# Altium PCB CPUBoard.PcbDoc
Units mil, origin at the board's own origin, x right, y up, seen from the top; angles counter-clockwise.
Board outline 5387.18 x 590.19 mil, 2 copper layers (Top Layer, Bottom Layer); 86 components, 65 nets, 284 pads, 220 vias.
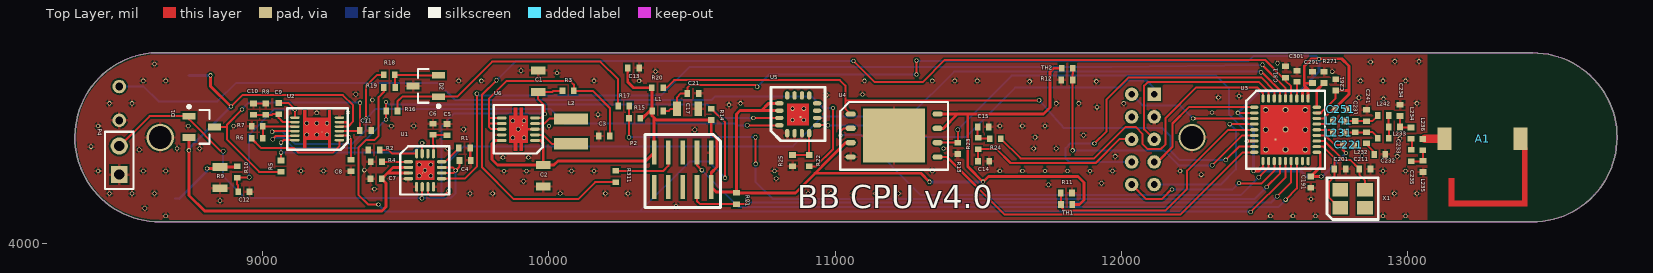
[diagram p0: Top Layer view]
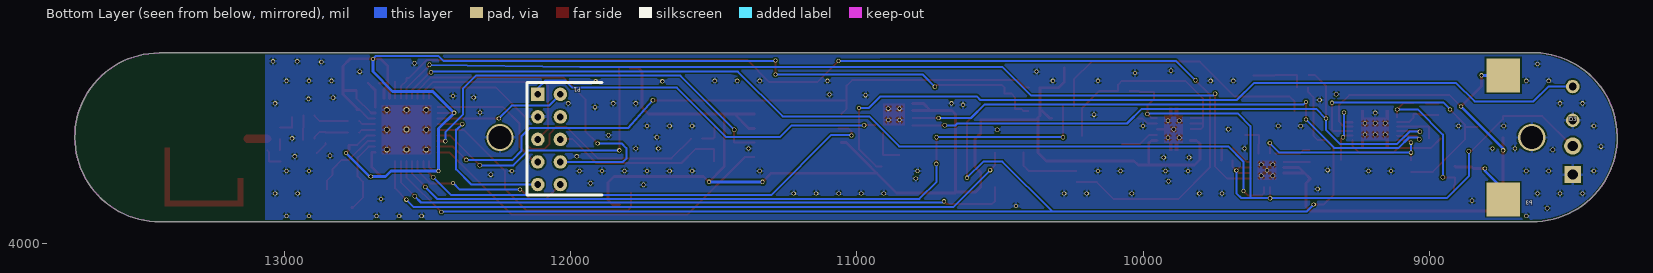
[diagram p1: Bottom Layer view, seen from below]

## Layer stack, top to bottom
Top Layer: signal copper 1.4
Dielectric: dielectric 12.6, FR-4, Dk 4.8
Bottom Layer: signal copper 1.4

## Board outline
8641.6,4074.5 cw(c8639.59,4370.22) 8610.33,4664.5 13436,4664.5 13436,4664.64 cw(c13435.95,4369.54) 13433.98,4074.44 13433.98,4074.5

## Design rules (kind name [scope] priority, off if disabled: settings)
Clearance "Stitching GND" [IsStitchingVia and InNet('GND') vs (IsVia and (Not IsStitchingVia)) Or IsPad] p1: gap=6
Clearance [All] p2: gap=6
HoleSize [All] p1: absolutevalues=TRUE maxlimit=500 minlimit=6 maxpercent=80.000 minpercent=20.000
HoleToHoleClearance [All] p1: gap=1 allowstackedmicrovias=TRUE
MinimumSolderMaskSliver [All] p1: minsoldermaskwidth=1
PlaneClearance [All] p1: clearance=10
PlaneConnect [All] p1: planeconnectstyle=Relief reliefexpansion=10 reliefentries=4 reliefconductorwidth=10 reliefairgap=10
PolygonConnect [All] p1: connectstyle=Relief reliefconductorwidth=10 reliefentries=4 polygonreliefangle="90 Angle"
RoutingLayers RoutingLayers_1 [InNet('GND')] p1: top layer_v5=FALSE bottom layer_v5=FALSE
RoutingLayers [All] p2: top layer_v5=TRUE bottom layer_v5=TRUE
RoutingVias [All] p1: holewidth=11 width=15 viastyle="Through Hole" minholewidth=11 minwidth=15 maxholewidth=1000 maxwidth=1000
SilkToSilkClearance [All] p1: silktosilkclearance=1
SilkscreenOverComponentPads [All] p1: minsilkscreentomaskgap=1
SolderMaskExpansion [All] p1: expansion=3
Width [All] p1: maxlimit=100 minlimit=7 preferedwidth=7
20 further rules are at their usual default settings.

## Classes and differential pairs
net class Antenna: NetA1_1
net class RF: RF_N RF_P
component class "I-O Expander": D3 R22 R25 U5
component class VREG: C1 C2 C3 L2 R3 U6
component class RF: A1 C231 C232 C233 C234 C235 C241 L231 L232 L233 L234 L235 L236 L241 L242
component class FLASH: C13 R20 U4
component class CPU: C14 C15 C17 C21 C191 C201 C211 C221 C251 C261 C291 C301 C311 L1 P1 P2 R11 R12 R13 R21 R23 R24 R271 R311 TH1 TH2 U3 X1
component class BAT: C4 C5 C6 C7 C8 C9 C10 C11 C12 D1 P3 P4 R1 R2 R4 R5 R6 R7 R8 R9 R10 U1 U2
component class CPU2: D2 R14 R15 R16 R17 R18 R19

## Components (designator, comment, footprint, x,y, rotation, side; value= is the part's Value field where it differs from the comment)
A1 "0915AT43A0026E" 0915AT43A0026 13256,4365 r0 top
C1 "Cap" C_0805 9962,4566 r270 top
C2 "Cap" C_0805 9980,4235 r90 top
C3 "Cap" C_0402 10193,4374 r0 top
C4 "Cap" C_0402 9707,4289 r180 top
C5 "Cap" C_0402 9644,4396.69 r270 top
C6 "Cap" C_0402 9595,4397.69 r270 top
C7 "Cap" C_0402 9396,4224.69 r0 top
C8 "Cap" C_0402 9308,4271 r90 top
C9 "Cap" C_0402 9056,4470 r270 top
C10 "Cap" C_0402 8968,4468 r270 top
C11 "Cap" C_0402 9359,4393 r180 top
C12 "Cap" C_0402 8934,4179.68 r180 top
C13 "Cap" C_0402 10295,4612 r180 top
C14 "Cap" C_0402 11518,4286 r180 top
C15 "Cap" C_0402 11517,4406 r180 top
C17 "Cap" C_0805 10484,4469 r180 top
C21 "Cap" C_0402 10503,4523 r180 top
C191 "Cap" C_0402 12661,4213 r90 top
C201 "Cap" C_0402 12763,4259 r180 top
C211 "Cap" C_0402 12850,4259 r180 top
C221 "Cap" C_0402 12793,4343 r180 top
C231 "Cap" C_0402 12816,4407 r270 top
C232 "Cap" C_0402 12902,4310 r0 top
C233 "Cap" C_0402 12914,4366 r0 top
C234 "Cap" C_0402 12973,4464 r270 top
C235 "Cap" C_0402 13012,4306 r270 top
C241 "Cap" C_0402 12856,4446 r270 top
C251 "Cap" C_0402 12766,4467 r180 top
C261 "Cap" C_0402 12748,4553 r270 top
C291 "Cap" C_0402 12667,4579 r270 top
C301 "Cap" C_0402 12613,4583 r90 top
C311 "Cap" C_0402 12573,4598 r270 top
D1 "BAT54C" SOT-23_N 8787,4406 r0 top
D2 "AZ23C5V6-V-GS08" SOT-23_N 9570,4549 r180 top
D3 "LED" LED 8499,4547 r270 bottom
L1 "Inductor" R_0402 10380,4462 r180 top
L2 "Inductor" L_1212 10077,4434 r270 top
L231 "Inductor" R_0402 12758,4386 r0 top
L232 "Inductor" R_0402 12856,4368 r270 top
L233 "Inductor" R_0402 12953,4406 r0 top
L234 "Inductor" R_0402 13011,4384 r270 top
L235 "Inductor" R_0402 13053,4268 r90 top
L236 "Inductor" R_0402 13052,4344 r90 top
L241 "Inductor" R_0402 12758,4427 r0 top
L242 "Inductor" R_0402 12914,4446 r0 top
P1 "Header 10" "609-4377-ND FEMALE" 12114,4519.7 r270 bottom
P2 "Header 5X2" "SMD HEADER" 10567,4196 r180 top
P3 "battery" PL-041939 8742,4586 r270 bottom
P4 "Charger input" HDR1X2 8498.94,4239.2 r90 top
R1 "Res2" R_0402 9705,4332 r180 top
R2 "Res2" R_0402 9389,4325 r180 top
R3 "Res2" R_0402 10067,4532 r180 top
R4 "Res2" R_0402 9397,4284 r0 top
R5 "Res2" R_0402 9064,4269 r90 top
R6 "Res2" R_0402 8981,4366 r180 top
R7 "Res2" R_0402 8981,4408 r0 top
R8 "Res2" R_0402 9011,4468 r90 top
R9 "Res2" R_0805 8851,4229 r270 top
R10 "Res2" R_0402 8911,4248.68 r90 top
R11 "Res2" R_0402 11807.32,4175 r180 top
R12 "Res2" R_0402 11809.31,4570 r0 top
R13 "Res2" R_0402 11428,4331 r90 top
R14 "Res2" R_0402 10567,4450 r270 top
R15 "Res2" R_0402 10299,4436 r0 top
R16 "Res2" R_0402 9451,4462 r0 top
R17 "Res2" R_0402 10261,4479 r0 top
R18 "Res2" R_0402 9442,4588 r0 top
R19 "Res2" R_0402 9443,4544 r180 top
R20 "Res2" R_0402 10379,4543 r180 top
R21 "Res2" R_0402 10655,4156 r90 top
R22 "Res2" R_0402 10909,4288 r90 top
R23 "Res2" R_0402 11499,4348 r270 top
R24 "Res2" R_0402 11558.81,4365 r180 top
R25 "Res2" R_0402 10851,4288 r90 top
R271 "Res2" R_0402 12707,4579 r270 top
R311 "Res2" R_0402 10233,4233 r270 top
TH1 "Res Thermal" R_0402 11808.32,4135 r180 top
TH2 "Res Thermal" R_0402 11810.31,4611 r0 top
U1 "BQ24079TRGTR" S-PVQFN-N16 9567,4254.69 r0 top
U2 "BQ27510DRZR-G2" S-PDSO-N12 9189,4399 r90 top
U3 "CC1110F32RSPR" TI_QFP36 12463.75,4475.05 r0 top
U4 "M25P16-VME6TG" VQFNPN8 11054,4451 r0 top
U5 "PCA9557" PCA9557BS 10870,4450 r90 top
U6 "TPS63001DRCR" S-PVSON-N10 9893,4398 r90 top
X1 "X_26.000/20/40/40/10" NX3225GA 12764,4124 r0 top

## Footprints (in the part's own frame and the unit in brackets; to place one, negate y for a bottom-side part, rotate by r counter-clockwise, add the part's x,y. Pads: shape width x height; smd on the part's side, far side on the other; paste and mask are expansions set on the pad)
"609-4377-ND FEMALE" [mm]
  rect 1.2x1.2 hole 0.6: 1(0,0)
  round 1.2 hole 0.6: 2(2,0) 3(4,0) 4(6,0) 5(8,0) 6(8,2) 7(6,2) 8(4,2) 9(2,2) 10(0,2)
  silkscreen extent -1.07,-0.97 8.93,5.7
0915AT43A0026 [mm]
  rect 1.25x2 smd: 1(-3.251,0) 2(3.499,0)
  Top Layer region: -2.876,-6 -2.376,-6 -2.376,-3.5 -2.876,-3.5
  Top Layer region: -2.515,-6 3.759,-6 3.759,-5.5 -2.515,-5.5
  Top Layer region: 3.624,-6 4.124,-6 4.124,-0.787 3.624,-0.787
C_0402 [mm]
  rect 0.5x0.6 smd: 1(-0.5,0) 2(0.5,0)
C_0805 [mm]
  rect 0.7x1.3 smd: 1(-0.95,0) 2(0.95,0)
HDR1X2 [mm] "Connector; Header; 2 Position"
  rect 1.5x1.5 hole 0.9: 1(0,0)
  round 1.524 hole 0.9: 2(2.54,0)
  silkscreen extent -1.27,-1.27 3.81,1.27
L_1212 [mm]
  rect 1x3 smd: 1(0,0) 2(2.2,0)
LED [mm]
  round 1.2 hole 0.7: 1(0,0) 2(3,0)
NX3225GA [mm] "Crystal, 26.000000MHz, 10.0pF, 50 ohms max, 20/40 ppm, -40C to +85C"
  rect 1.4x1.2 smd: 1(0,0) 2(2.2,1.6) ""(0,1.6) ""(2.2,0)
  silkscreen extent -1.18,-1.07 3.37,2.66
PCA9557BS [mm]
  oval 0.75x0.38 smd: 1(-1.676,0.96) 2(-1.676,0.31) 3(-1.676,-0.34) 4(-1.676,-0.99) 9(1.674,-0.99) 10(1.674,-0.34) 11(1.674,0.31) 12(1.674,0.96)
  oval 0.38x0.75 smd: 5(-0.976,-1.69) 6(-0.326,-1.69) 7(0.324,-1.69) 8(0.974,-1.69) 13(0.974,1.66) 14(0.324,1.66) 15(-0.326,1.66) 16(-0.976,1.66)
  round 0.2 smd mask+0: 17(-0.232,-0.22)
  Top Layer region: 0.975,-0.975 0.975,0.975 -0.975,0.975 -0.975,-0.975
  silkscreen extent -2.35,-2.39 2.4,2.39
PL-041939 [mm] "Li-Po battery pack"
  rect 3x3 smd: 1(0,0) 2(11,0)
R_0402 [mm]
  rect 0.5x0.6 smd: 1(-0.5,0) 2(0.5,0)
R_0805 [mm]
  rect 0.7x1.3 smd: 1(-0.95,0) 2(0.95,0)
S-PDSO-N12 [mm]
  oval 0.2x0.85 smd mask+0.05: 1(-1,-2.009) 2(-0.6,-2.009) 3(-0.2,-2.009) 4(0.2,-2.009) 5(0.6,-2.009) 6(1,-2.009) 7(1,1.941) 8(0.6,1.941) 9(0.2,1.941) 10(-0.2,1.941) 11(-0.6,1.941) 12(-1,1.941)
  round 0.076 smd: 13(-0.279,-0.457)
  Top Layer region: -1.65,1.191 1.65,1.191 1.65,0.941 0.975,0.941 0.975,-1.009 1.65,-1.009 1.65,-1.259 -1.65,-1.259 -1.65,-1.009 -0.975,-1.009 -0.975,0.941 -1.65,0.941
  silkscreen extent -1.86,-2.71 1.84,2.64
S-PVQFN-N16 [mm]
  oval 0.85x0.28 smd mask+0.07: 1(-1.475,0.75) 2(-1.475,0.25) 3(-1.475,-0.25) 4(-1.475,-0.75) 9(1.475,-0.75) 10(1.475,-0.25) 11(1.475,0.25) 12(1.475,0.75)
  oval 0.28x0.85 smd mask+0.07: 5(-0.75,-1.475) 6(-0.25,-1.475) 7(0.25,-1.475) 8(0.75,-1.475) 13(0.75,1.475) 14(0.25,1.475) 15(-0.25,1.475) 16(-0.75,1.475)
  round 0.076 smd: 17(-0.229,-0.254)
  Top Layer region: -0.85,-0.85 0.85,-0.85 0.85,0.85 -0.85,0.85
  silkscreen extent -2.19,-2.16 2.15,2.13
S-PVSON-N10 [mm]
  oval 0.28x0.85 smd mask+0.07: 1(-1,-1.475) 2(-0.5,-1.475) 3(0,-1.475) 4(0.5,-1.475) 5(1,-1.475) 6(1,1.475) 7(0.5,1.475) 8(0,1.475) 9(-0.5,1.475) 10(-1,1.475)
  round 0.076 smd: 11(0.33,-0.38)
  Top Layer region: -1.2,0.825 1.2,0.825 1.2,0.39 1.9,0.39 1.9,0.11 1.2,0.11 1.2,-0.11 1.9,-0.11 1.9,-0.39 1.2,-0.39 1.2,-0.825 -1.2,-0.825 -1.2,-0.39 -1.9,-0.39 -1.9,-0.11 -1.2,-0.11 -1.2,0.11 -1.9,0.11 -1.9,0.39 -1.2,0.39
  silkscreen extent -2.16,-2.18 2.15,2.16
"SMD HEADER" [mil]
  rect 16x84 smd: 1(0,-120) 2(0,0) 3(50,-120) 4(50,0) 5(100,-120) 6(100,0) 7(150,-120) 8(150,0) 9(200,-120) 10(200,0)
  silkscreen extent -32,-184 231,71
SOT-23_N [mm] "SOT23, 3-Leads, Body 2.9x1.3mm, Pitch 0.95mm, Lead Span 2.5mm, IPC Medium Density"
  rect 1.15x0.6 smd: 1(-1.125,0.95) 2(-1.125,-0.95) 3(1.125,0)
  silkscreen extent -1.25,-1.5 0.7,1.92, body extent -0.7,-1.5 0.7,1.5, height 1.1
TI_QFP36 [mm]
  oval 0.75x0.28 smd mask+0.051: 1(-0.006,-0.007) 2(-0.006,-0.507) 3(-0.006,-1.007) 4(-0.006,-1.507) 5(-0.006,-2.007) 6(-0.006,-2.507) 7(-0.006,-3.007) 8(-0.006,-3.507) 9(-0.006,-4.007) 19(5.544,-4.007) 20(5.544,-3.507) 21(5.544,-3.007) 22(5.544,-2.507) 23(5.544,-2.007) 24(5.544,-1.507) 25(5.544,-1.007) 26(5.544,-0.507) 27(5.544,-0.007)
  oval 0.28x0.75 smd mask+0.051: 10(0.769,-4.782) 11(1.269,-4.782) 12(1.769,-4.782) 13(2.269,-4.782) 14(2.769,-4.782) 15(3.269,-4.782) 16(3.769,-4.782) 17(4.269,-4.782) 18(4.769,-4.782) 28(4.769,0.768) 29(4.269,0.768) 30(3.769,0.768) 31(3.269,0.768) 32(2.769,0.768) 33(2.269,0.768) 34(1.769,0.768) 35(1.269,0.768) 36(0.769,0.768)
  round 0.2 smd: 37(1.88,-2.87)
  Top Layer region: 0.569,-4.207 4.969,-4.207 4.969,0.193 0.569,0.193
  silkscreen extent -0.71,-5.46 6.27,1.45
VQFNPN8 [mm]
  rect 5.5x4.8 smd: 0(3.835,-1.922)
  oval 0.9x0.48 smd: 1(0,0) 2(0,-1.27) 3(0,-2.54) 4(0,-3.81) 5(7.7,-3.81) 6(7.7,-2.54) 7(7.7,-1.27) 8(7.7,0)
  silkscreen extent -0.93,-4.94 8.62,1.06

## Part data
A1: "RF CHIP ANTENNA 902 - 928MHZ"
C1 C2 C3 C4 C5 C6 C7 C8 C9 C10 C11 C12 C13 C14 C15 C17 C21 C191 C201 C211 C221 C231 C232 C233 C234 C235 C241 C251 C261 C291 C301 C311: "Capacitor"
D1: "FAIRCHILD SEMICONDUCTOR - BAT54C - SCHOTTKY RECTIFIER, CMN CTHD 0.2A SOT-23"
D2: "Zener Diodes 5.6 Volt 0.3W 5% CA"
D3: library part LED1, "Typical RED GaAs LED"
P1: "Header, 10-Pin"
P2: "Header, 5-Pin, Dual row"
P3: library part "Header 2", "Header, 2-Pin"
P4: library part "Header 2", "SM Battery Holder 1/2 AA"
R1 R2 R3 R4 R5 R6 R7 R8 R9 R10 R11 R12 R13 R14 R15 R16 R17 R18 R19 R20 R21 R22 R23 R24 R25 R271 R311: "Resistor"
TH1 TH2: "Thermistor"
U1: "IC LI-ION CHARGE/PWR MGMT 16QFN"
U2: "IC BATT FUEL GAUGE LI-ION 12SON"
U3: "RF Microcontrollers (MCU) True System-on-Chip"
U4: "IC FLASH 16MBIT 75MHZ 8VDFPN"
U5: "8 channel IO expander"
U6: "DC/DC Switching Regulators 96% Buck-Boost Conv"
X1: library part XTAL, "Crystal Oscillator"

## Via types
v1: diameter 15, hole 11, Top Layer to Bottom Layer, 193 vias
v2: diameter 15, hole 11.81, Top Layer to Bottom Layer, 16 vias
v3: diameter 19.68, hole 15, Top Layer to Bottom Layer, tented top, 9 vias
v4: diameter 95, hole 78.74, Top Layer to Bottom Layer, 2 vias

## Nets (pads, with @x,y where several pads share a name; then routed paths per layer and width w, separated by ;. In a path a pad name is that pad's centre, name@x,y a point inside that pad or via, vN(x,y) a via of type N, cw(c..) or ccw(c..) an arc to the next point about the centre after c; other vN are vias at no path point)
3V3: C2.2 C13.2 L1.2 P2.2 P2.9 R14.2 R15.2 R20.2 R21.2 TH1.1 TH2.1 U4.3 U4.7 U4.8 U5.13 U5.14 U6.1 U6.10 | length 4739.1
  Top Layer w10: U6.10 9812.63,4358.63 9801,4347 9801,4292 9820.6,4272.4 C2.2 ; U6.1 9970.37,4358.63 9980,4349 C2.2 ; C13.2 10275.31,4562.5 10294.81,4543 10360.31,4543 L1.2 ; R15.2 10326,4436 10352,4462 L1.2 ; R21.2 10861.38,4175.69 11036.7,4351 U4.3 ; U5.14 10742,4462.74 ; U5.13 10767.59,4488.33 10742,4462.74 ; 10929.7,4244 11299,4244 v1(11329,4214) ; U4.7 11377.2,4401 11427,4450.8 ; U4.8@11358,4450.8 11427,4450.8 ; 11462.5,4450.8 11427,4450.8 ; TH2.1 11762.5,4611 11750,4598.5 11750,4474 11727,4451 11462.5,4451 11462.5,4267.5 v1(11516,4214) 11535,4233 11848,4233 11869,4212 11869,4151 11853,4135 TH1.1 ; C2.2 10016.4,4272.4 10031,4287 10338,4287 P2.9 10367,4438.31 ; L1.2 10360.31,4445 10367,4438.31 ; 10367,4438.31 10375,4430.31 R14.2 10567,4384 10587,4364 10587,4266 10567,4246 P2.2 10584.31,4178.69 10655,4178.69 10655,4450 10667.74,4462.74 10742,4462.74
  Bottom Layer w10: v1(11329,4214) v1(11516,4214)
AVDD: C17.2 C21.2 C191.2 C221.2 C251.2 C261.2 C291.2 L1.1 U3.2 U3.10 U3.19 U3.22 U3.25 U3.26 U3.28 U3.29 | length 4603.3
  Top Layer w7: L1.1 10419,4462 10426,4469 C17.2 10446.6,4508.6 10461,4523 C21.2 10483.31,4542.31 10494,4553 10720,4553 v1(10727,4546) ; v1(11284,4589) v1(11284,4638) ; v1(12406.11,4455.11) U3.2 ; 12494.01,4266.01 U3.10 ; U3.22 12710.63,4376.37 12744,4343 C221.2 ; U3.25 12706.74,4435.42 C251.2@12738.31,4467 ; U3.26@12696.33,4455.11 12748,4506.78 C261.2
  Top Layer w10: v1(12461,4252) 12480,4252 12494.01,4266.01 ; U3.29 12631.8,4531.8 12644.5,4544.5 ; 12638.69,4558.31 C291.2@12667,4558.31 ; U3.28 12651.49,4537.51 12644.5,4544.5 ; U3.19 12694.24,4317.31 12694.24,4265.92 C191.2 v1(12697.69,4232.69) ; U3.26 U3.26@12696.33,4455.11 ; C251.2@12738.31,4467 C251.2 12746.31,4472.31 12794,4520 12794,4533.31 ; C261.2 12794,4533.31 ; C221.2 12773.31,4325.69 v1(12784,4315) ; 12644.5,4544.5 12638,4551 12638,4619 12663,4644 12769,4644 12794,4619 12794,4533.31
  Bottom Layer w7: v1(10727,4546) 10770,4589 v1(11284,4589) ; v1@11282.45,4637.05 12444.05,4637.05 12460,4653 12681,4653 v1@12690,4644
  Bottom Layer w10: v1@12690,4644 v1(12690,4643) 12690,4599 12621,4530 12481,4530 v1(12406.11,4455.11) 12461,4400.22 v1(12461,4252) 12627,4252 12646.31,4232.69 v1(12697.69,4232.69) 12701.69,4232.69 v1(12784,4315)
CHG: U1.9 U3.32 | length 3335.5
  Top Layer w7: U1.9 9706.16,4225.16 9748,4267 v1(9748,4522) ; v1@12490.5,4623.5 12572.75,4541.25 U3.32
  Bottom Layer w7: v1(9748,4522) 9754,4516 10392,4516 10492,4616 11966.5,4616 v1(12492,4623)
DAC_OUT: C14.2 P1.8 R23.2 | length 633.7
  Top Layer w7: C14.2 11498.31,4327.63 R23.2 11563.69,4328.31 11612,4280 11910,4280 11994,4364 P1.8@12035.26,4364
DC: P2.4 R21.1 U3.15 | length 2230.7
  Top Layer w7: P2.4 10517,4147 10528,4136 10685,4136 v1(10695,4146) ; v1(12544,4164) 12592.43,4212.43 U3.15
  Bottom Layer w7: v1@10701,4142 12522,4142 v1(12544,4164)
DD: P2.3 U3.16 | length 2322.2
  Top Layer w7: P2.3 10517,4272 v1(10534,4255) ; v1(12573,4152) 12612.12,4191.12 U3.16
  Bottom Layer w7: v1(10534,4255) 10663,4126 12547,4126 v1(12573,4152)
DETECT: P1.10 U3.3 | length 463.1
  Top Layer w7: v1(12250,4435.42) U3.3
  Bottom Layer w7: P1.10 12074.96,4480 12205.42,4480 v1(12250,4435.42)
EOS: P1.5 U3.4 | length 560.3
  Top Layer w7: v1(12378,4415.74) U3.4
  Bottom Layer w7: P1.5 12345.74,4204.74 12399,4258 12399,4397 12396.74,4397 v1(12378,4415.74)
GND: C1.1 C2.1 C3.1 C4.1 C5.1 C6.1 C7.1 C8.1 C10.1 C11.1 C12.1 C13.1 C14.1 C15.1 C17.1 C21.1 C191.1 C201.1 C211.1 C221.1 C232.2 C234.1 C241.1 C251.1 C261.1 C291.1 C301.2 C311.1 D2.3 D3.2 L235.1 P1.2 P2.1 P4.1 R1.1 R2.2 R4.1 R7.1 R8.2 R9.2 R11.1 R12.1 R13.1 R25.1 R271.1 U1.4 U1.5 U1.8 U1.17 U2.6 U2.13 U3.37 U4.0 U4.4 U5.1 U5.2 U5.3 U5.6 U5.17 U6.3 U6.9 U6.11 | length 257.9
  Top Layer w8: C10.1 R8.2 ; R1.1 9724.69,4291 C4.1 ; 9873.31,4378.31 v2(9893,4398) ; 9893,4388.16 v2(9893,4398) ; U6.3 v2(9893,4398) ; v2(9893,4398) 9893,4417.68 9902.84,4427.53 9912.69,4417.69 v2(9893,4398)
  other v1: 8661.42,4094.49 12519.69,4094.49 12598.43,4094.49 12677.17,4094.49 12913.39,4094.49 12992.13,4094.49 8588,4122 10444,4130 8851,4148 12662,4154 8464.57,4173.23 8543.31,4173.23 8622.05,4173.23 9724.41,4173.23 9803.15,4173.23 10039.38,4173.23 10196.86,4173.23 10275.6,4173.23 10905.52,4173.23 10984.26,4173.23 11063,4173.23 11141.74,4173.23 11220.48,4173.23 12952.76,4173.23 13031.5,4173.23 9390,4189 11745,4204 11930,4209 9911,4216 10794,4226 12278.47,4239.2 8425.2,4251.97 8582.68,4251.97 8661.42,4251.97 9133.86,4251.97 9212.6,4251.97 9842.52,4251.97 9921.27,4251.97 10078.75,4251.97 10157.49,4251.97 10787.41,4251.97 11338.59,4251.97 11574.81,4251.97 11653.55,4251.97 11732.29,4251.97 11811.03,4251.97 11889.77,4251.97 11968.51,4251.97 12204.73,4251.97 12913.39,4251.97 12992.13,4251.97 9355,4255 9839,4299 9928,4299 11978,4303 12963,4303 12840,4305 8569,4326 8700.79,4330.71 8779.53,4330.71 9645.67,4330.71 11377.96,4330.71 11692.92,4330.71 11771.66,4330.71 8400,4337 12972,4366 11698,4370 11867,4377 10509,4396 9702,4398 8425.2,4409.45 8740.16,4409.45 8897.64,4409.45 9448.82,4409.45 9527.56,4409.45 10000.01,4409.45 11574.81,4409.45 11653.55,4409.45 11732.29,4409.45 10850.32,4430.31 10889.68,4430.31 10171,4448.79 9189,4455 12316,4456 10850.32,4469.69 10889.68,4469.69 11914,4475 10629,4483 8464.57,4488.19 8543.31,4488.19 10669.3,4488.19 11771.66,4488.19 11850.4,4488.19 12007.88,4488.19 13031.5,4488.19 9383,4500 12915,4504 12829,4508 12338,4509 12410,4514 10969,4517 11095,4519 9325,4520 11679,4565 11912,4565 8582.68,4566.93 8661.42,4566.93 9685.04,4566.93 9763.78,4566.93 10157.49,4566.93 10314.97,4566.93 11102.37,4566.93 11338.59,4566.93 11417.33,4566.93 11496.07,4566.93 12834.65,4566.93 12913.39,4566.93 12992.13,4566.93 10028,4594 10371.73,4599.28 12736,4599 9902,4602 8622,4626 12545.04,4628.41 12870,4633 12954,4635 13039,4635
  other v2: 9547.32,4235 9586.69,4235 9567,4254.69 9547.32,4274.37 9586.69,4274.37 9873.32,4368.47 9912.69,4368.47 9153.57,4379.26 9189,4379.26 9224.43,4379.26 9153.57,4418.63 9189,4418.63 9224.43,4418.63 9873.32,4427.53 9912.69,4427.53
  other v3: 12503.46,4326.76 12572.75,4326.76 12642.04,4326.76 12503.46,4396.05 12642.04,4396.05 12572.75,4397.05 12503.46,4465.35 12572.75,4465.35 12642.04,4465.35
  other v4: 8641.98,4369.02 12246,4369
MISO: U3.11 U4.2 | length 1709.9
  Top Layer w7: v1(11018,4376) 11018,4390 11029,4401 U4.2@11064,4401 ; v1(12479,4230) 12485.5,4236.5 12486.42,4236.5 12509.51,4259.59 12509.51,4260.51 12513.69,4264.69 U3.11
  Bottom Layer w7: v1(11018,4376) 11019,4377 11090,4377 11299,4168 12417,4168 v1(12479,4230)
MOSI: U3.9 U4.5 | length 1279
  Top Layer w7: U4.5@11357.15,4300.8 11390.2,4300.8 11590.31,4100.69 12206.69,4100.69 12423.31,4317.31 U3.9
NetA1_1: A1.1 L236.2 | length 69.3
  Top Layer w7: L236.2@13059,4363.37 L236.2@13059.63,4364
  Top Layer w29.53: L236.2@13059.63,4364 A1.1@13128,4364
NetC3_2: C3.2 R3.1 U6.6 U6.7 U6.8 | length 833.5
  Top Layer w7: 9791.63,4437.37 U6.6 ; U6.8 9799,4398 9790,4407 9790,4419 ; U6.7 9791.32,4417.68 9790,4419 ; C3.2 10212.69,4472 10152.69,4532 R3.1 10086.69,4554 10073.69,4567 9853,4567 9790,4504 9790,4419
NetC8_2: C8.2 U2.2 U2.5 | length 265.8
  Top Layer w7: U2.2 9296,4375.38 v1(9301.38,4370) 9308,4363.38 C8.2
  Top Layer w8: U2.5 9294.53,4422.62 9298,4426.09 v1(9298,4456)
  Bottom Layer w8: v1@9298,4372.38 v1(9298,4456) ; v1@9299,4372.38 v1(9301.38,4370)
NetC9_1: C9.1 C12.2 R10.1 U2.7 | length 531.8
  Top Layer w7: C12.2 8914.31,4202 8911,4205.31 R10.1 8912,4230 v1(8953,4230) ; C9.1 9089.31,4489.69 v1(9112,4467) 9112.57,4466.43 U2.7
  Bottom Layer w7: v1(8953,4230) 8953,4379 9041,4467 v1(9112,4467)
NetC9_2: C9.2 C10.2 R8.1 U2.8 | length 164.4
  Top Layer w7: C10.2 8989,4448.31 R8.1 9032,4448.32 9034,4450.31 C9.2 9056,4437.5 9070.88,4422.62 U2.8
NetC15_2: C15.2 R23.1 R24.2 | length 82
  Top Layer w7: C15.2 11497.31,4369.06 11498.69,4367.69 11500.69,4365.69 R24.2@11541,4365.69
NetC231_1: C231.1 C241.2 L241.2 L242.1 | length 120.1
  Top Layer w7: L241.2 C231.1@12812.37,4427 ; C231.1 C241.2@12855.37,4426.69 ; C241.2 12875.63,4426.31 L242.1@12894.32,4445
NetC231_2: C231.2 C233.1 L231.2 L232.1 | length 126.6
  Top Layer w7: L231.2 C231.2@12814,4386 ; C231.2 L232.1@12855.63,4387.31 ; L232.1 12876.69,4387.69 12894.32,4370.06 C233.1@12894.32,4365
NetC232_1: C232.1 L232.2 | length 48.6
  Top Layer w7: L232.2@12856,4350 12856,4344.32 C232.1@12886.32,4314
NetC233_2: C233.2 L233.1 L242.2 | length 84.9
  Top Layer w7: L233.1@12933,4403 L242.2@12933,4445.63 ; C233.2@12933.37,4360.69 L233.1@12933.37,4403
NetC234_2: C234.2 L233.2 L234.1 | length 79.2
  Top Layer w7: C234.2@12973.37,4440.31 12973.37,4402.69 12974.06,4403.37 L234.1@13014.68,4403.37
NetC235_1: C235.1 L234.2 | length 39
  Top Layer w7: L234.2@13014.68,4364 13014.68,4326.37 C235.1@13015.68,4325.37
NetC235_2: C235.2 L235.2 L236.1 | length 81.5
  Top Layer w7: C235.2@13012,4286 13053,4286 13053,4318 L236.1@13059,4324
NetC301_1: C301.1 U3.30 | length 59.1
  Top Layer w7: C301.1@12612,4564.32 12612.12,4564.2 U3.30
NetC311_2: C311.2 R311.2 U3.31 | length 3812.9
  Top Layer w7: v1(9817,4569) 9766,4518 9766,4265 9877,4154 10102,4154 10161.31,4213.31 R311.2 ; v1(11064,4636) 11138,4562 11305,4562 11383,4640 12501,4640 12564.34,4576.66 12571.34,4576.66 12572,4576 12572,4567.81 12592.43,4547.38 U3.31
  Bottom Layer w7: v1(9817,4569) 9885.05,4637.05 10916.3,4637.05 10917.35,4636 v1@11062,4636
NetD2_1: D2.1 R16.2 R17.1 | length 979.8
  Top Layer w7: R16.2 9470.69,4494.78 9487.5,4511.6 D2.1 9679.06,4511.6 9801.46,4634 10179.32,4634 10241.32,4572 R17.1
NetD2_2: D2.2 R18.2 R19.1 | length 197.7
  Top Layer w7: R19.1 9462.69,4565 9461.69,4566 R18.2 9537,4588 9538.6,4586.4 D2.2
NetD3_1: D3.1 R22.1 | length 2835.3
  Top Layer w7: R22.1@10914,4268.32 10932.09,4268.32 10992,4328.22 v1(10992,4472)
  Bottom Layer w7: D3.1 8584,4547 8636,4495 8842,4495 8907,4560 9612,4560 9672,4500 10568,4500 10581,4513 10917,4513 10958,4472 v1(10992,4472)
NetL2_1: L2.1 U6.4 | length 74.5
  Top Layer w7: U6.4 9983.68,4417.68 10002,4436 L2.1@10018,4436
NetL2_2: L2.2 U6.2 | length 135.3
  Top Layer w7: U6.2 9978.69,4378.31 10011.06,4345.94 L2.2@10073,4345.94
NetP1_1: P1.1 U5.5 | length 1309.3
  Top Layer w7: U5.5 10937,4412 v1(10974,4412)
  Bottom Layer w7: v1@10974,4411.56 11227.44,4411.56 11269,4370 11455,4370 11628,4543 11993,4543 12018,4568 12087,4568 12114,4541 P1.1
NetR1_2: R1.2 U1.12 | length 80
  Top Layer w7: U1.12 9637.53,4284.21 R1.2
NetR2_1: R2.1 U1.16 | length 124.7
  Top Layer w7: R2.1@9417.69,4324.69 9440.31,4324.69 9452.24,4312.76 U1.16
NetR4_2: R4.2 U1.1 | length 92.9
  Top Layer w7: R4.2@9416.69,4282.69 9418.21,4284.21 U1.1
NetR5_2: R5.2 U1.15 U2.12 | length 660.4
  Top Layer w7: R5.2 v1(9064,4316) ; v1(9064,4351) 9072.63,4359.63 U2.12 ; U1.15 v1@9557.16,4349.16
  Bottom Layer w7: v1(9064,4351) v1(9064,4316) 9524,4316 v1@9559,4351
  other v1: 9557,4350
NetR6_2: R6.2 U2.1 | length 357
  Top Layer w7: R6.2@8960.91,4365.59 8993.5,4333 9108,4333 9124,4317 9246,4317 9268.08,4339.08 U2.1
NetR22_2: R22.2 R25.2 U5.4 | length 134.3
  Top Layer w7: R25.2 R22.2 U5.4
NewNet1: A1.2
PACK+: C7.2 D1.2 P3.1 U1.2 U1.3 U2.4 | length 2204.4
  Top Layer w7: v1(8889,4477) 8929,4517 9280,4517 9316,4481 9316,4425 9297.87,4406.87 U2.4
  Top Layer w10: D1.2 8742.71,4166.79 8797.5,4112 9416.16,4112 9431.22,4127.05 9431.22,4209.16 C7.2 9435.84,4244.84 ; v1(8818,4586) 8818,4548 v1(8889,4477) ; U1.3 9435.84,4244.84 ; U1.2 9455.53,4264.53 9435.84,4244.84
  Bottom Layer w10: v1(8742,4324) 8742,4330 v1(8889,4477) ; P3.1 v1(8818,4586)
PACK-: P3.2 R9.1 R10.2 | length 268.8
  Top Layer w10: v1(8806,4261) 8845.6,4261 R9.1 8909.03,4266.4 R10.2
  Bottom Layer w7: P3.2@8694,4155.93 P3.2@8709.93,4155.93
  Bottom Layer w10: P3.2@8709.93,4155.93 8806,4252 v1(8806,4261)
PGOOD: U1.7 U3.33 | length 3299.3
  Top Layer w7: U1.7 9576.84,4175.16 9585,4167 9634,4167 v1(9649,4182) ; v1@12487,4601 12553.06,4534.94 U3.33
  Bottom Layer w7: v1(9649,4182) 9649,4285 9702,4338 10852,4338 10957,4443 11259,4443 11415,4599 12487,4599 v1(12487,4597)
RBIAS: R271.2 U3.27 | length 94.9
  Top Layer w10: U3.27 12682,4534.31 R271.2
RF_N: L241.1 U3.24 | length 61
  Top Layer w7: U3.24 12727.06,4415.74 L241.1
RF_P: L231.1 U3.23 | length 60.5
  Top Layer w7: U3.23 12728.26,4396.05 L231.1
RSET: P2.7 R311.1 | length 237.4
  Top Layer w7: R311.1 10400,4252.69 10417,4269.69 P2.7
SCK: R13.2 U3.7 U4.6 | length 1397
  Top Layer w7: U4.6@11357.47,4350.68 R13.2 v1(11428,4396)
  Top Layer w10: v1@12437,4356.68 U3.7
  Bottom Layer w7: v1(11428,4396) 11427.5,4396.5 11616,4585 12330,4585 12376,4539 12376,4449 12437,4388 v1(12437,4356)
SCL: R15.1 R17.2 U3.13 | length 2644.4
  Top Layer w7: v1(10279.32,4370) R15.1 10279.32,4477.63 R17.2 ; v1@10721,4278 v1(10721,4370) ; v1(12507,4196) 12506,4196 12553.06,4243.06 U3.13
  Bottom Layer w7: v1(10279.32,4370) v1(10721,4370) ; v1@10721,4277 10721,4215 10781,4155 12466,4155 v1(12507,4196)
  other v1: 10722,4277
SCL2: R16.1 U2.11 U5.15 | length 1998.2
  Top Layer w7: v1(9035,4363) 9046.5,4374.5 9111.69,4374.5 U2.11 ; v1@9431,4429 9431,4461.68 R16.1 9431,4462.32 v1(9431,4493) ; v1(10713.85,4437.15) U5.15
  Bottom Layer w7: v1(9035,4363) 9041,4369 9071,4369 9107,4333 9332,4333 v1(9431,4432) ; v1(9431,4493) 9439,4485 10553,4485 10600.85,4437.15 v1(10713.85,4437.15)
SDA: R14.1 R19.2 U3.14 | length 4454.9
  Top Layer w7: v1(9404,4135) 9368,4135 9335,4168 9335,4334.7 9360.3,4360 9390,4360 9405,4375 9405,4509.69 9423.31,4528 R19.2 ; R14.1 10615,4421.69 v1(10615,4228) ; v1(12451,4109) 12572.75,4230.75 U3.14
  Bottom Layer w7: v1(9404,4135) 9429,4110 10316,4110 ; v1(10615,4228) 10558,4285 10491,4285 10316,4110 ; v1@12451,4110 10316,4110
SDA2: R18.1 U2.10 U5.16 | length 2158.9
  Top Layer w7: v1@9033,4391.13 U2.10 ; v1(9361,4435) 9361,4549 9400,4588 R18.1 ; v1(10692.44,4411.56) U5.16
  Bottom Layer w7: v1(9033,4389) 9034,4390 9069,4390 9113,4346 9311,4346 9361,4396 v1(9361,4435) 9395,4469 10005,4469 10056,4418 10648.56,4418 10655,4411.56 v1(10692.44,4411.56)
SSN: R20.1 U3.8 U4.1 | length 2329.1
  Top Layer w7: R20.1 10411,4543 10437,4569 11016,4569 11035,4550 11035,4470 U4.1 ; 11035,4499 v1(11712,4499) ; v1(12364.12,4291) 12410.12,4337 U3.8
  Bottom Layer w7: v1(11712,4499) 11799,4402 12143,4402 12171,4374 12171,4322 12202,4291 v1(12364.12,4291)
TEXT: R11.2 TH1.2 U3.5 | length 883.6
  Top Layer w7: R11.2 11787.63,4155 11788.63,4154 TH1.2 11788.63,4125.37 11800.31,4113.69 12152.69,4113.69 12229.31,4190.31 12229.31,4253.31 12372.05,4396.05 U3.5
TINT: R12.2 TH2.2 U3.6 | length 986.7
  Top Layer w7: v1(11829,4324) R12.2 11829,4590 11830,4591 TH2.2 ; v1(12317,4272) 12421.37,4376.37 U3.6
  Bottom Layer w7: v1(11829,4324) 12147,4324 12199,4272 v1(12317,4272)
TRIG: P1.7 U3.34 | length 1214.5
  Top Layer w7: v1(11905,4348) 11948,4391 11948,4502 12025,4579 12487.38,4579 12533.38,4533 U3.34
  Bottom Layer w7: v1(11905,4348) 11821,4348 11805,4332 11805,4295 11816.52,4283.48 P1.7
TS: R6.1 R7.2 U2.9 | length 152.8
  Top Layer w7: R6.1 9000.69,4406.87 U2.9
VCHG: C1.2 C4.2 D1.1 P4.2 R3.2 U1.6 U1.10 U1.11 U6.5 | length 2538.6
  Top Layer w7: P4.2@8501,4339.2 8605.2,4443.4 D1.1 8742.71,4432.29 8854,4321 v1(8862,4321) ; v1(9556,4157) 9557.16,4158.16 U1.6 ; U1.10 9665.16,4244.84 v1(9674,4253.69) ; U1.11 9663.16,4264.53 v1(9674,4253.69) ; C4.2 9687.31,4267 v1(9674,4253.69) ; U6.5 9971.37,4437.37 v1(9985,4451) 9985,4480 9962,4503 C1.2 10012.09,4528.6 10015.5,4532 R3.2
  Bottom Layer w7: v1@8862,4320 8862,4234 8939,4157 v1(9556,4157) 9656,4157 ; v1(9674,4253.69) 9674,4175 9656,4157 ; v1@9985,4452 9668,4452 9625,4409 9625,4157 9656,4157
VCLK: P1.4 U3.1 | length 476.8
  Top Layer w7: P1.4 12125.48,4283.48 12178,4336 12178,4418 12234.79,4474.79 U3.1
VG: R24.1 U3.36 | length 1212.2
  Top Layer w7: R24.1 11647.5,4296 11904,4296 12014,4406 12049,4406 12074,4381 12074,4346 12092,4328 12136,4328 12154,4346 12154,4437 12261,4544 12474,4544 12494.01,4523.99 U3.36
VIDEO: P1.6 U3.12 | length 596.6
  Top Layer w7: P1.6 12085,4155 12142,4155 12176,4189 v1(12176,4187) ; v1@12410,4208 12488,4208 12533.38,4253.38 U3.12
  Bottom Layer w7: v1(12176,4187) 12387,4187 v1(12410,4210)
VIN: C5.2 C6.2 U1.13 | length 115.3
  Top Layer w7: U1.13 9596.53,4344 9595,4345.53 C6.2 9619,4378 9620,4377 C5.2
VPACK_OR_CHG: C11.2 D1.3 R5.1 U2.3 | length 996
  Top Layer w7: D1.3 8875.5,4406 ; v1(8928,4467) 8875.5,4414.5 8875.5,4406 ; R5.1 8987.89,4249.32 8875.5,4361.71 8875.5,4406 ; U2.3 9335.44,4391.13 C11.2@9341.31,4397 ; C11.2@9340,4397 v1@9340,4488.69 ; v1(9340,4490) v1@9341.31,4488.69
  Bottom Layer w7: v1(8928,4467) 8928,4469 8950,4491 9336,4491 v1@9337,4490
VST: P1.3 U3.35 | length 679.9
  Top Layer w7: P1.3 12079,4397.22 12079,4550 12091.5,4562.5 12480.5,4562.5 12513.69,4529.31 U3.35
XOSC_Q1: C211.2 U3.21 X1.2 | length 269.2
  Top Layer w7: U3.21 12708.32,4356.68 12774,4291 12798.31,4291 C211.2 12830.31,4238.69 12850.61,4218.39 X1.2
XOSC_Q2: C201.2 U3.20 X1.1 | length 277.2
  Top Layer w7: U3.20 12704.62,4337 12743.31,4298.3 C201.2 12743.31,4233.04 12725.44,4215.17 12725.44,4158.81 X1.1@12760.25,4124
  Top Layer w10: X1.1@12760.25,4124 X1.1
pads on no net: P1.9 P2.5 P2.6 P2.8 P2.10 U1.14 U3.17 U3.18 U5.7 U5.8 U5.9 U5.10 U5.11 U5.12 X1.

## Polygon pours and split planes (outlines as drawn)
GND on Bottom Layer "GND Plane" (solid, remove dead copper, pour order 11): 8342,4658 8342,4080 13066,4080 13066,4658 8342,4658
GND on Top Layer "GND Plane" (solid, remove dead copper, pour order 13): 8341,4664 8341,4075 13067,4075 13067,4664 8341,4664

## Keep-outs
Keep-Out Layer:
  lines w1: 13433.98,4074.44 ccw(c13435.95,4369.54) 13436,4664.64 ; 13433.98,4074.5 8641.6,4074.5 cw(c8639.59,4370.22) 8610.33,4664.5 13436,4664.5

## Silkscreen, mask and mechanical layers (free items; w line width, h text height)
Top Overlay:
  lines w7.87: 9086.64,4325.14 9271.68,4325.14 9297.27,4350.73 9297.27,4470.81 9086.64,4470.81 9086.64,4325.14 ; 9480.78,4169.84 9651.65,4169.84 9651.65,4338.74 9508.14,4338.74 9480.78,4311.38 9480.78,4169.84 ; 9806.76,4312.96 9955.98,4312.96 9977.63,4334.61 9977.63,4482.84 9806.76,4482.84 9806.76,4312.96 ; 12436,4260.31 12711,4260.31 12711,4532.31 12471,4532.31 12436,4497.31 12436,4260.31
  text "BB CPU v4.0" at 10867,4122 h80